# EAGLE board untitled (EAGLE 7.6.0)
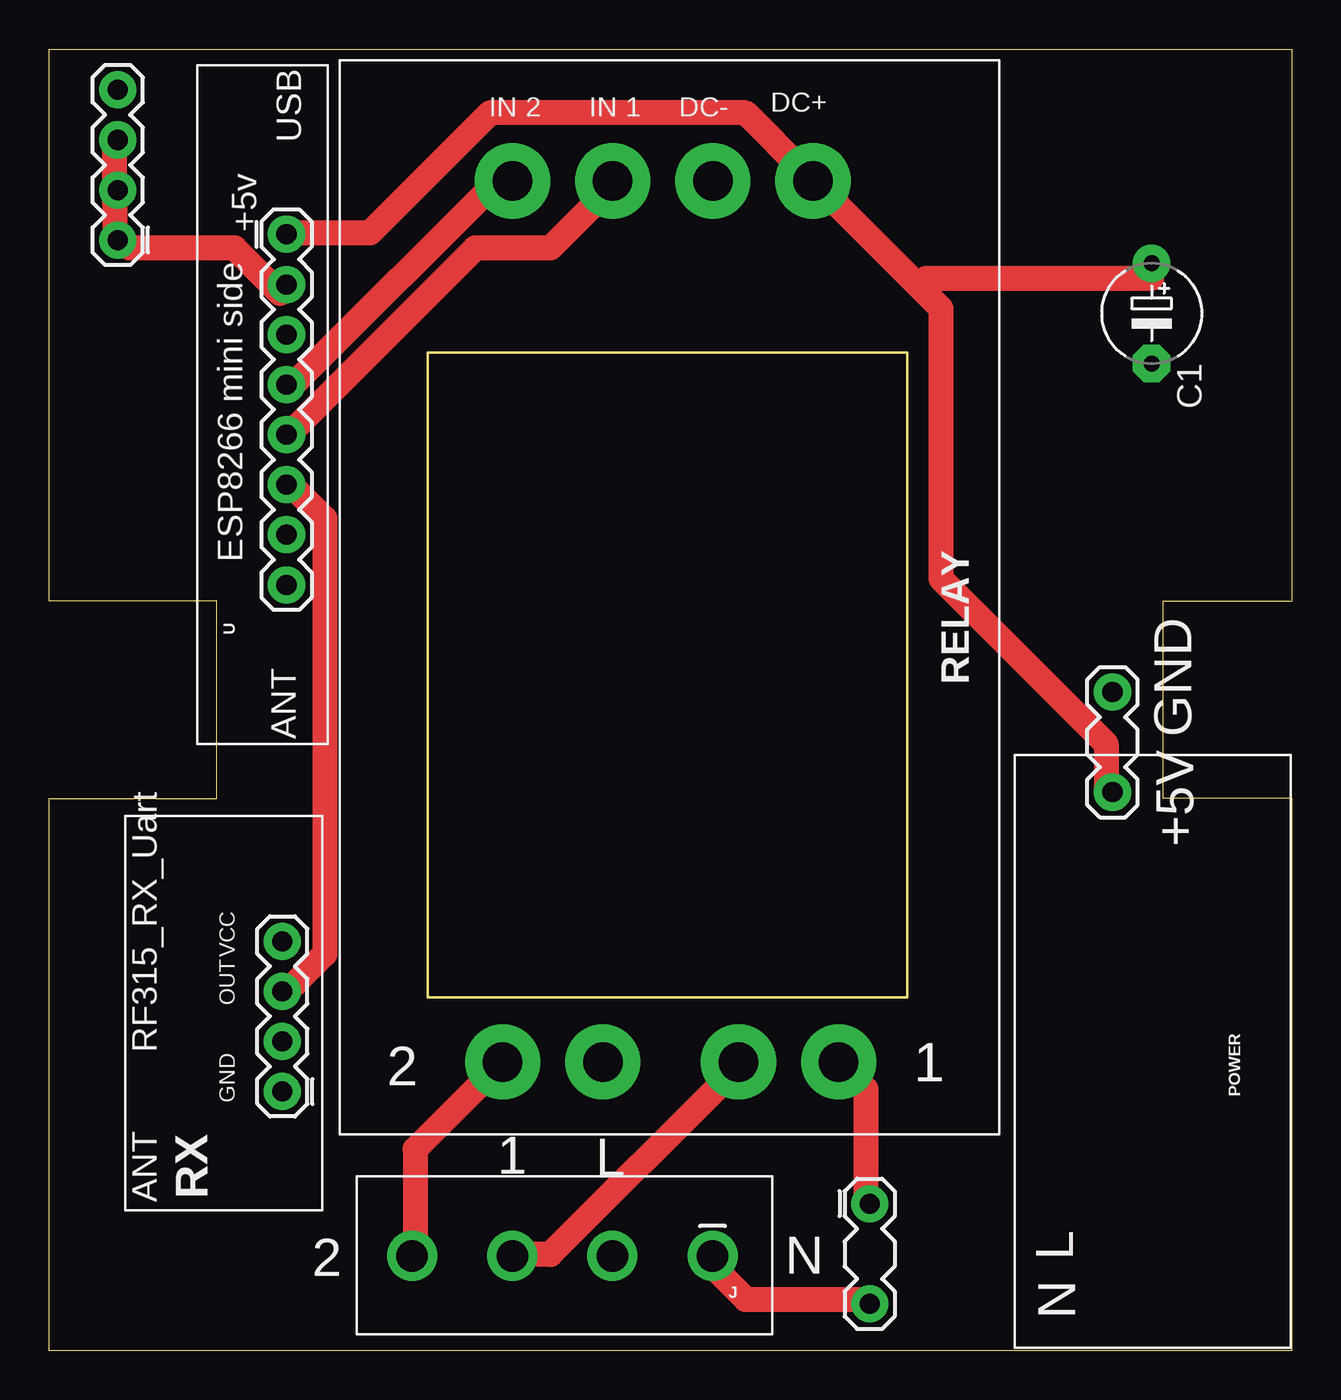
[diagram p0: board, top side]
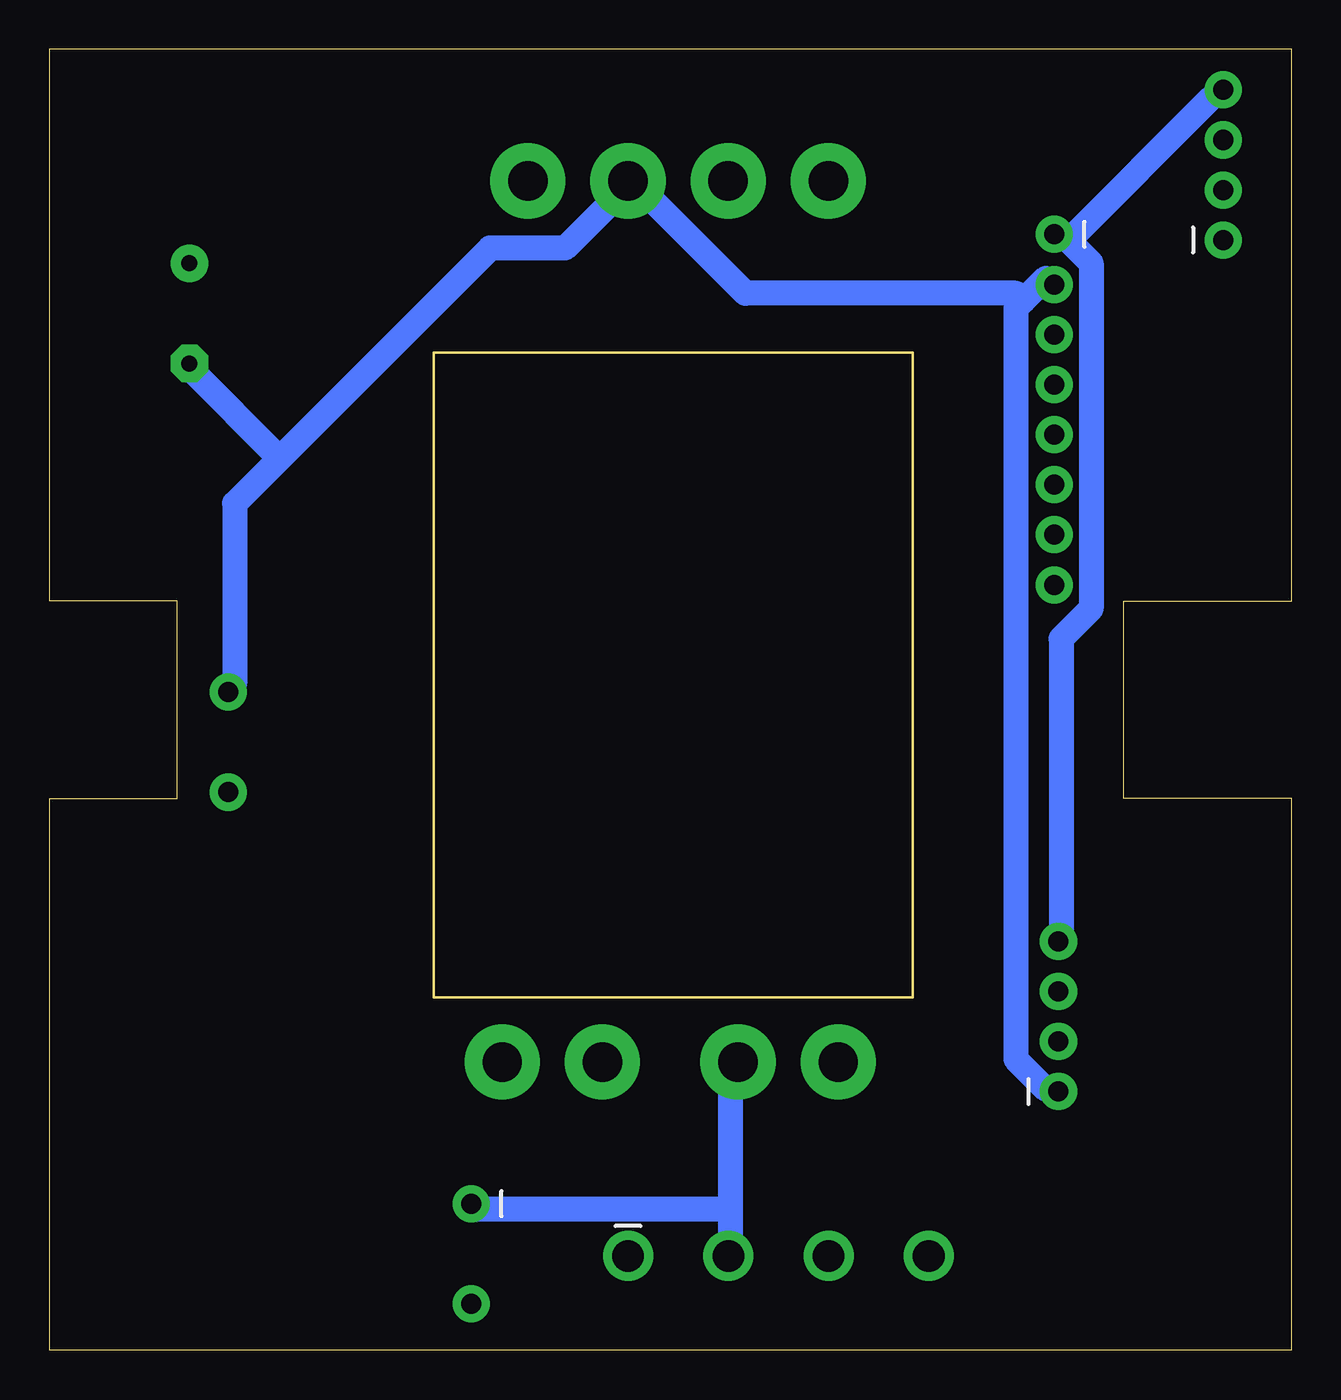
[diagram p1: board, bottom side, seen from below]

Size 63 x 66 mm. Coordinates in mm from the lower left corner, seen from the top.
Outline: 0,0 63,0 63,28 56.5,28 56.5,38 63,38 63,66 0,66 0,38 8.5,38 8.5,28 0,28 0,0
Copper layers (1*16): Top 0.035mm / dielectric 1.5mm / Bottom 0.035mm
Design rules "default *": minimum track width 50mil, minimum drill 24mil, track to track 10mil, track to pad 10mil, pad to pad 10mil, via to via 10mil, smd to smd 10mil, copper to edge 40mil, drill to drill 8mil, minimum pad ring 10mil, minimum via ring 8mil, stop-mask expansion 4mil, vias tented up to drill 0mil, thermal gap 10mil

## Footprints (pad centres in the part's own frame; a part is rotated, then mirrored left to right if it is on the bottom)
E5-5 = drill 0.813 pad 1.905: + -2.54,0 | drill 0.813 pad 1.905 octagon: - 2.54,0
OUT_HEAD_4_AC_2CH = drill 1.6 pad 2.54: 1 -7.14,0.22; 2 -2.06,0.22; 3 3.02,0.22; 4 8.1,0.22
2.54*4 = drill 1.016 pad 1.88: 1 -3.68,2.03; 2 -1.14,2.03; 3 1.4,2.03; 4 3.94,2.03
AC_DC_SIDE = drill 1.016 pad 1.88: 1 -7.67,15; 2 -12.75,15; 3 13.21,2.68; 4 18.29,2.68
2_SOLID_RELAY = drill 2 pad 3.81: 1 -6.23,-29.32; 2 -1.15,-29.32; 3 3.93,-29.32; 4 9.01,-29.32; 5 -7.53,15.38; 6 -2.45,15.38; 7 4.43,15.38; 8 9.51,15.38
315MHZ_RX_UART = drill 1.016 pad 1.88: 1 -2.87,-4.32; 2 -0.33,-4.32; 3 2.21,-4.32; 4 4.75,-4.32
ESP8266_MINI_SIDE = drill 1.016 pad 1.88: 1 -10.61,1.53; 2 -8.07,1.53; 3 -5.53,1.53; 4 -2.99,1.53; 5 -0.45,1.53; 6 2.09,1.53; 7 4.63,1.53; 8 7.17,1.53

## Placement (x,y rotation side)
C1  [E5-5]  55.9,52.6 270 top
J  [OUT_HEAD_4_AC_2CH]  26.5,5 180 top
J1  [2.54*4]  5.5,60 90 top
POWER  [AC_DC_SIDE]  56.6,15.1 90 top
RELAY  [2_SOLID_RELAY]  32.5,30 180 top
RX  [315MHZ_RX_UART]  7.5,16 90 top
U  [ESP8266_MINI_SIDE]  10.5,46 270 top

## Library data of the parts
C1 = resistor
J J1 POWER RELAY RX U = rx

## Nets
+5V: C1.+ J1.4 POWER.3 RELAY.1 RX.4 U.1
D1: RX.3 U.6
D2: RELAY.3 U.5
D3: RELAY.4 U.4
D4: U.3
GND: C1.- J1.1 J1.2 J1.3 POWER.4 RELAY.2 RX.1 U.2
L: J.2 POWER.1 RELAY.5 RELAY.7
N: J.1 POWER.2
N$17: U.8
OUT1: J.3 RELAY.6
OUT2: J.4 RELAY.8
RX: U.7

## Tracks (layer width: path | path; a pad name or v marks a point on that pad's centre or on a via)
+5V
  Top 1.27: 44.08,54.01 39.12,58.96 RELAY.1 38.36,59.72 35.31,62.77 22.36,62.77 16.26,56.67 12.45,56.67 U.1 | 44.08,54.01 45.22,52.86 45.22,39.15 53.6,30.77 53.6,28.48 POWER.3 | C1.+ 55.89,54.39 44.46,54.39 44.08,54.01
  Bottom 1.27: 11.31,56.29 11.69,56.67 U.1 | 11.31,56.29 10.17,55.15 10.17,37.62 11.69,36.1 11.69,20.86 RX.4 | 11.31,56.29 4.07,63.53 J1.4
D1
  Top 1.27: RX.3 12.45,18.57 13.98,20.1 13.98,42.2 12.45,43.72 U.6
D2
  Top 1.27: U.5 12.45,46.77 21.6,55.91 25.41,55.91 28.46,58.96 RELAY.3
D3
  Top 1.27: U.4 12.45,49.05 23.12,59.72 RELAY.4
GND
  Top 1.27: J1.3 3.31,61.25 3.31,58.96 J1.2 3.31,58.2 3.31,56.67 J1.1 4.07,55.91 9.41,55.91 11.69,53.63 U.2
  Bottom 1.27: 51.32,45.24 40.65,55.91 36.84,55.91 33.79,58.96 RELAY.2 33.03,58.96 27.69,53.63 13.98,53.63 13.6,53.24 | 51.32,45.24 53.6,42.96 53.6,33.81 POWER.4 | 13.6,53.24 12.45,54.39 U.2 | 13.6,53.24 13.98,52.86 13.98,14.76 12.45,13.24 RX.1 | 51.32,45.24 55.89,49.82 C1.-
L
  Top 1.27: RELAY.5 41.41,13.24 41.41,7.91 POWER.1
  Bottom 1.27: 28.46,7.14 28.46,14 RELAY.7 | 28.46,7.14 28.46,4.86 J.2 | 28.46,7.14 41.41,7.14 POWER.1
N
  Top 1.27: POWER.2 41.41,2.57 35.31,2.57 33.79,4.1 J.1
OUT1
  Top 1.27: J.3 23.88,4.86 25.41,4.86 34.55,14 RELAY.6
OUT2
  Top 1.27: J.4 18.55,4.86 18.55,10.19 22.36,14 RELAY.8